# EAGLE board eTapper1main12 (EAGLE 8.2.2)

Size 126.67 x 68.57 mm. Coordinates in mm from the lower left corner, seen from the top.
Outline: 0,0 126.67,0 126.67,68.57 0,68.57 0,0
Copper layers (1*16): Top 0.035mm / dielectric 1.5mm / Bottom 0.035mm
Design rules "default *": minimum track width 6mil, minimum drill 15mil, track to track 6mil, track to pad 6mil, pad to pad 6mil, via to via 6mil, smd to smd 6mil, copper to edge 40mil, drill to drill 6mil, minimum pad ring 10mil, minimum via ring 8mil, stop-mask expansion 4mil, vias tented up to drill 0mil, thermal gap 10mil

## Footprints (pad centres in the part's own frame; a part is rotated, then mirrored left to right if it is on the bottom)
C0805 = smd 1.3 x 1.5: 1 -0.95,0; 2 0.95,0
SOD323_ST = smd 0.8 x 0.6: A 1.25,0; C -1.25,0
SO20W = smd 0.66 x 2.032: 1 -5.715,-5.029; 2 -4.445,-5.029; 3 -3.175,-5.029; 4 -1.905,-5.029; 5 -0.635,-5.029; 6 0.635,-5.029; 7 1.905,-5.029; 8 3.175,-5.029; 9 4.445,-5.029; 10 5.715,-5.029; 11 5.715,5.029; 12 4.445,5.029; 13 3.175,5.029; 14 1.905,5.029; 15 0.635,5.029; 16 -0.635,5.029; 17 -1.905,5.029; 18 -3.175,5.029; 19 -4.445,5.029; 20 -5.715,5.029
TO252 = smd 1 x 1.6: 1 -2.28,-4.8; 3 2.28,-4.8 | smd 5.4 x 6.2: 2 0,2.5
TO92 = drill 0.813 pad 1.27 octagon: 1 -1.27,0; 2 0,1.905; 3 1.27,0
TSSOP38_R-PDSO-G38-DA = smd 0.35 x 1: 1 -5.85,-3.85; 2 -5.2,-3.85; 3 -4.55,-3.85; 4 -3.9,-3.85; 5 -3.25,-3.85; 6 -2.6,-3.85; 7 -1.95,-3.85; 8 -1.3,-3.85; 9 -0.65,-3.85; 10 0,-3.85; 11 0.65,-3.85; 12 1.3,-3.85; 13 1.95,-3.85; 14 2.6,-3.85; 15 3.25,-3.85; 16 3.9,-3.85; 17 4.55,-3.85; 18 5.2,-3.85; 19 5.85,-3.85; 20 5.85,3.85; 21 5.2,3.85; 22 4.55,3.85; 23 3.9,3.85; 24 3.25,3.85; 25 2.6,3.85; 26 1.95,3.85; 27 1.3,3.85; 28 0.65,3.85; 29 0,3.85; 30 -0.65,3.85; 31 -1.3,3.85; 32 -1.95,3.85; 33 -2.6,3.85; 34 -3.25,3.85; 35 -3.9,3.85; 36 -4.55,3.85; 37 -5.2,3.85; 38 -5.85,3.85
SO08 = smd 0.6 x 2.2: 1 -1.905,-2.6; 2 -0.635,-2.6; 3 0.635,-2.6; 4 1.905,-2.6; 5 1.905,2.6; 6 0.635,2.6; 7 -0.635,2.6; 8 -1.905,2.6
DF2 = drill 0.9: 1 -6.35,-3.81; 3 -1.27,-3.81; 5 3.81,-3.81; 6 6.35,-3.81; 7 6.35,3.81; 8 3.81,3.81; 10 -1.27,3.81; 12 -6.35,3.81
L2825P = smd 1.4 x 2.4: 1 -1.2,0; 2 1.2,0
FC-12M = smd 0.7 x 1.4: 1 -0.85,0; 2 0.85,0
R0402 = smd 0.7 x 0.9: 1 -0.65,0; 2 0.65,0
B3F-10XX = drill 1.016 long: 1 -3.251,2.261; 2 3.251,2.261; 3 -3.251,-2.261; 4 3.251,-2.261
M251 = drill 0.813 long: 1 -2.54,0; 2 0,0; 3 2.54,0
F/QMBIII = drill 0.914 pad 2.159 octagon: + 3.251,0; - -3.251,0
TO92' = drill 0.813 octagon: 1 1.27,0; 2 0,1.905; 3 -1.27,0
TP06R = smd 0.6 x 0.6: TP 0,0
I-PAK_TO251AA = drill 0.889 long: 1 -2.286,-5.334; 2 0,-5.334; 3 2.286,-5.334 | smd 5.334 x 6.223: 4 0,4.445
XFMR = drill 0.6 square: P$1 -10.16,5.08; P$2 -10.16,-5.08; P$3 10.16,5.08; P$4 10.16,-5.08
FH12-45S-0.5SH = smd 0.3 x 1.3: 1 -13,3.25; 2 -12.5,3.25; 3 -12,3.25; 4 -11.5,3.25; 5 -11,3.25; 6 -10.5,3.25; 7 -10,3.25; 8 -9.5,3.25; 9 -9,3.25; 10 -8.5,3.25; 11 -8,3.25; 12 -7.5,3.25; 13 -7,3.25; 14 -6.5,3.25; 15 -6,3.25; 16 -5.5,3.25; 17 -5,3.25; 18 -4.5,3.25; 19 -4,3.25; 20 -3.5,3.25; 21 -3,3.25; 22 -2.5,3.25; 23 -2,3.25; 24 -1.5,3.25; 25 -1,3.25; 26 -0.5,3.25; 27 0,3.25; 28 0.5,3.25; 29 1,3.25; 30 1.5,3.25; 31 2,3.25; 32 2.5,3.25; 33 3,3.25; 34 3.5,3.25; 35 4,3.25; 36 4.5,3.25; 37 5,3.25; 38 5.5,3.25; 39 6,3.25; 40 6.5,3.25; 41 7,3.25; 42 7.5,3.25; 43 8,3.25; 44 8.5,3.25; 45 9,3.25
32005-601 = drill 0.7 pad 1.016: 1 2.825,1.6; 2 1.625,0.8; 3 2.825,0; 4 1.625,-0.8; 5 2.825,-1.6 | drill 1 pad 1.422 long: M1 -2.225,3.65; M2 -2.225,-3.65
1501_03 = drill 1.1 pad 1.7: 1 -1.85,0.3; 2 1.85,-1; 3 -1.85,-5.7 | hole 1.1: 0,0; 0,-6

## Placement (x,y rotation side)
C1  .01uF  [C0805]  123.7,45.21 0 top
C2  .01uF  [C0805]  4.57,43.18 270 top
C3  [C0805]  108.46,45.72 270 top
C4  [C0805]  4.83,51.82 90 top
C5  3.3uF  [C0805]  118.11,35.81 90 top
C6  220uF  [C0805]  115.06,35.81 90 top
C7  220uF  [C0805]  17.27,29.46 90 top
C8  3.3uF  [C0805]  20.83,29.46 90 top
C9  47uF  [C0805]  100.58,45.21 270 top
C10  47uF  [C0805]  99.31,30.48 0 top
C11  12pF  [C0805]  60.71,26.16 270 top
C12  12pF  [C0805]  59.69,29.46 0 top
C13  1 uF  [C0805]  45.21,13.21 180 top
C14  .1uF  [C0805]  75.18,22.35 270 top
C15  .1uF  [C0805]  86.11,21.84 270 top
C16  .1uF  [C0805]  114.55,55.63 270 top
C17  .1uF  [C0805]  20.57,60.2 270 top
C18  .1uF  [C0805]  112.01,42.42 180 top
C19  .1uF  [C0805]  20.83,44.2 90 top
C20  .1uF  [C0805]  44.96,24.64 270 top
C21  .1uF  [C0805]  32.26,21.59 180 top
C22  220uF  [C0805]  4.83,47.24 270 top
D1  BAT60J  [SOD323_ST]  11.68,33.53 180 top
D2  BAT60J  [SOD323_ST]  109.73,29.72 0 top
D3  BAT60J  [SOD323_ST]  2.54,47.24 90 top
IC1  74AC373DW  [SO20W]  87.38,32.26 90 top
IC2  74AC373DW  [SO20W]  29.21,30.73 90 top
IC3  LM2936DT-5.0  [TO252]  10.67,61.72 90 top
IC4  LM2936Z-3.0  [TO92]  104.39,44.96 270 top
IC5  MSP430F2232IDA  [TSSOP38_R-PDSO-G38-DA]  52.32,30.99 90 top
IC7  LP2951M  [SO08]  122.43,37.34 0 top
IC8  LP2951M  [SO08]  3.56,37.08 0 top
K2  DF2-DC3V  [DF2]  96.52,8.38 270 top
K3  DF2-DC3V  [DF2]  30.48,8.38 270 top
L3  470uH  [L2825P]  100.58,60.96 90 top
Q3  FC-12M  [FC-12M]  58.42,26.92 90 top
R1  47K  [R0402]  123.95,49.28 180 top
R2  47K  [R0402]  123.95,54.1 180 top
R3  47K  [R0402]  123.95,58.93 180 top
R4  [R0402]  123.7,63.75 180 top
R5  47K  [R0402]  120.9,43.18 270 top
R6  47K  [R0402]  45.21,10.92 180 top
R7  1K  [R0402]  123.95,47.5 0 top
R8  3K  [R0402]  123.95,52.32 0 top
R9  6K  [R0402]  123.95,56.9 0 top
R10  12K  [R0402]  123.7,61.98 0 top
R11  3K  [R0402]  123.44,43.18 0 top
R12  51K  [R0402]  102.62,8.64 90 top
R13  1K  [R0402]  106.17,29.72 0 top
R14  1K  [R0402]  95.25,56.64 90 top
R15  47K  [R0402]  13.21,56.9 180 top
R16  47K  [R0402]  13.21,52.07 180 top
R17  47K  [R0402]  13.46,47.5 180 top
R18  47K  [R0402]  18.29,43.43 180 top
R19  47K  [R0402]  13.97,36.32 270 top
R20  47K  [R0402]  4.83,56.64 90 top
R21  1K  [R0402]  56.64,23.11 180 top
R22  1K  [R0402]  13.21,55.12 0 top
R23  3K  [R0402]  13.21,50.29 0 top
R24  6K  [R0402]  13.46,45.97 0 top
R25  12K  [R0402]  14.48,43.43 0 top
R26  3K  [R0402]  2.79,43.18 90 top
R27  51K  [R0402]  24.38,8.38 270 top
R28  47K  [R0402]  76.96,22.1 90 top
R29  47K  [R0402]  88.65,21.59 90 top
R30  47K  [R0402]  112.78,55.88 270 top
R31  47K  [R0402]  18.54,60.2 270 top
R32  47K  [R0402]  112.01,44.2 180 top
R33  47K  [R0402]  22.61,44.45 270 top
R34  47K  [R0402]  42.67,24.89 270 top
R35  100  [R0402]  27.43,18.03 180 top
R36  47K  [R0402]  24.13,22.1 90 top
S1  [B3F-10XX]  71.12,19.05 90 bottom
S2  [B3F-10XX]  81.28,19.05 90 bottom
S3  [B3F-10XX]  108.58,52.7 90 bottom
S4  [B3F-10XX]  18.41,52.7 90 bottom
S5  [B3F-10XX]  108.58,35.94 90 bottom
S6  [B3F-10XX]  18.41,37.47 90 bottom
S7  [B3F-10XX]  50.29,19.05 90 bottom
S8  [M251]  38.1,19.05 90 bottom
SG1  F/QMBIII  [F/QMBIII]  108.71,62.23 0 top
T1  2N3904  [TO92']  97.03,60.96 90 top
T2  2N3904  [TO92']  8.64,55.12 0 top
T3  2N3904  [TO92']  118.62,47.5 0 top
T4  2N3904  [TO92']  118.62,52.32 0 top
T5  2N3904  [TO92']  118.62,57.15 0 top
T6  2N3904  [TO92']  118.62,61.98 0 top
T7  2N3904  [TO92']  117.35,42.67 270 top
T9  2N3904  [TO92']  8.64,50.55 0 top
T10  2N3904  [TO92']  8.89,45.97 0 top
T11  2N3904  [TO92']  10.41,41.4 0 top
T12  2N3904  [TO92']  10.41,37.59 180 top
TP1  TPSTP06R  [TP06R]  2.54,61.47 0 top
TP2  TPSTP06R  [TP06R]  2.54,60.2 0 top
TP3  TPSTP06R  [TP06R]  2.54,58.93 0 top
TP4  TPSTP06R  [TP06R]  2.54,57.66 0 top
TP5  TPSTP06R  [TP06R]  2.54,56.39 0 top
TP6  TPSTP06R  [TP06R]  2.54,55.12 0 top
TP7  TPSTP06R  [TP06R]  2.54,62.74 0 top
TP8  TPSTP06R  [TP06R]  2.54,49.78 0 top
TP9  TPSTP06R  [TP06R]  2.54,52.83 0 top
U$1  IRLR024N  [I-PAK_TO251AA]  119.13,29.72 270 top
U$2  IRLR024N  [I-PAK_TO251AA]  8.13,29.72 90 top
U$3  XFMR  [XFMR]  114.3,12.95 180 top
U$4  XFMR  [XFMR]  12.19,12.95 0 top
X1  FH12-45S-0.5SH  [FH12-45S-0.5SH]  30.23,55.12 90 top
X2  MINI-USB_SHIELD5P2-32005-601  [32005-601]  46.99,6.1 90 top
X3  MINI-USB_SHIELD5P2-32005-601  [32005-601]  80.01,6.1 90 top
X4  1501_03  [1501_03]  88.27,2.41 180 top
X5  1501_03  [1501_03]  38.73,2.41 180 top

## Library data of the parts
C1-C22 L3 = rcl
D1-D3 = diode
IC1 IC2 = 74xx-eu
IC3 = national-semiconductor; MF: NATIONAL SEMICONDUCTOR; MPN: LM2936DT-5.0/NOPB; OC_FARNELL: 1286864; OC_NEWARK: 41K4501
IC4 = national-semiconductor; MF: NATIONAL SEMICONDUCTOR; MPN: LM2936Z-3.0/NOPB; OC_FARNELL: 1312709; OC_NEWARK: 41K4531
IC5 = texas; MPN: MSP430F2232IDA; OC_FARNELL: 1610178; OC_NEWARK: 28M6312
IC7 IC8 = national-semiconductor; MF: FAIRCHILD SEMICONDUCTOR; MPN: LP2951CM; OC_FARNELL: 9488561; OC_NEWARK: 78K6014
K2 K3 = relay; OC_FARNELL: unknown; OC_NEWARK: unknown
Q3 = crystal
R1-R36 = resistor
S1-S7 = switch-omron; MPN: B3F-1000; OC_FARNELL: 176432; OC_NEWARK: 36M3542
S8 = switch
SG1 = buzzer; OC_FARNELL: unknown; OC_NEWARK: unknown
T1-T7 T9-T12 = transistor-neu-to92
TP1-TP9 = testpad
U$1 U$2 = IRLR024N
U$3 U$4 = XFMR
X1 = con-hirose; OC_FARNELL: unknown; OC_NEWARK: unknown
X2 X3 = con-cypressindustries; OC_FARNELL: unknown; OC_NEWARK: unknown
X4 X5 = con-lumberg; OC_FARNELL: 1200127; OC_NEWARK: unknown

## Nets
+3V: C9.1 IC1.20 IC2.20 IC4.1 IC5.2 IC5.16 R20.2 R28.2 R29.2 R30.2 R31.2 R32.2 R33.2 R34.2 R36.2 TP5.TP X1.2 X1.3 X3.4
+9V: C3.1 C4.1 D3.C IC3.1 IC4.3 IC5.28 IC7.8 IC8.8
/LCS: IC5.8 X1.8
/RST: C13.1 IC5.7 R6.1
BAT+: C22.1 D3.A TP8.TP
GND: C3.2 C4.2 C5.2 C6.2 C7.2 C8.2 C9.2 C10.2 C11.2 C12.2 C13.2 C14.2 C15.2 C16.2 C17.2 C18.2 C19.2 C20.2 C21.2 C22.2 IC1.1 IC1.10 IC2.1 IC2.10 IC3.2 IC4.2 IC5.4 IC5.15 S1.4 S2.4 S3.4 S4.4 S5.4 S6.4 S7.4 S8.2 T1.3 T2.3 T3.3 T4.3 T5.3 T6.3 T7.3 T9.3 T10.3 T11.3 T12.3 TP7.TP TP9.TP U$1.3 U$2.3 X1.1 X1.4 X1.5 X1.6 X1.12 X1.13 X1.14 X1.15 X1.16 X1.25 X1.26 X1.27 X1.28 X1.29 X1.30 X1.31 X1.32 X1.33 X1.34 X1.45 X2.4 X2.5 X3.5
IO1_0: C14.1 IC5.31 R28.1 S1.2
IO1_1: C15.1 IC5.32 R29.1 S2.2
IO1_2: C16.1 IC5.33 R30.1 S3.2
IO1_3: C17.1 IC5.34 R31.1 S4.2
IO4_0: IC1.3 IC2.3 IC5.17 X1.17
IO4_1: IC1.4 IC2.4 IC5.18 X1.18
IO4_2: IC1.7 IC2.7 IC5.19 X1.19
IO4_3: IC1.8 IC2.8 IC5.20 X1.20
IO4_4: IC1.13 IC2.13 IC5.21 X1.21
IO4_5: IC5.22 X1.22
IO4_6: IC5.23 X1.23
IO4_7: IC5.24 X1.24
J2_1: K2.3 R12.1 U$3.P$3
J2_3: K2.10 R12.2 U$3.P$4
J3_1: K3.3 R27.1 U$4.P$3
J3_3: K3.10 R27.2 U$4.P$4
LD_/C: IC5.29 X1.9
LEDA: X1.36
LEDK1: X1.37
LEDK2: X1.38
LEDK3: X1.39
LEDK4: X1.40
LHVTRIG: IC5.30 R13.1
LNC1: X1.41
LNC2: X1.42
LNC3: X1.43
LNC4: X1.44
LRD: IC5.10 X1.11
LRESET: IC5.26 X1.7
LSDO: X1.35
LTS+: K2.8 X4.1
LTS-: K2.5 X4.3
LVSEL: IC1.11 IC5.14
LWR: IC5.9 X1.10
N$1: IC1.2 R1.1
N$2: IC1.5 R2.1
N$3: IC1.6 R3.1
N$4: IC1.9 R4.1
N$5: IC1.12 R5.1
N$6: L3.2 SG1.- T1.1
N$7: R4.2 T6.2
N$8: R5.2 T7.2
N$9: D2.A U$1.2 U$1.4 U$3.P$1
N$10: R7.1 T3.1
N$11: R8.1 T4.1
N$12: R9.1 T5.1
N$13: R1.2 T3.2
N$14: R2.2 T4.2
N$15: R3.2 T5.2
N$16: R10.1 T6.1
N$17: C1.2 IC7.7 R7.2 R8.2 R9.2 R10.2 R11.2
N$18: C1.1 C5.1 C6.1 D2.C IC7.1 R11.1 U$3.P$2
N$19: D1.A U$2.2 U$2.4 U$4.P$1
N$20: IC2.2 R15.1
N$21: R13.2 U$1.1
N$22: R14.2 T1.2
N$23: R35.1 S8.1
N$24: IC2.5 R16.1
N$25: IC2.6 R17.1
N$26: IC2.9 R18.1
N$27: IC2.12 R19.1
N$29: R15.2 T2.2
N$30: R16.2 T9.2
N$31: R17.2 T10.2
N$32: R18.2 T11.2
N$33: R19.2 T12.2
N$34: K2.1 K3.1 R35.2
N$35: R22.1 T2.1
N$36: R23.1 T9.1
N$37: R24.1 T10.1
N$38: R25.1 T11.1
N$39: C2.2 IC8.7 R22.2 R23.2 R24.2 R25.2 R26.2
N$40: C2.1 C7.1 C8.1 D1.C IC8.1 R26.1 U$4.P$2
N$42: R21.2 U$2.1
N$45: IC7.4 T7.1
N$47: IC8.4 T12.1
RHVTRIG: IC5.3 R21.1
RTS+: K3.8 X5.1
RTS-: K3.5 X5.3
RVSEL: IC2.11 IC5.25
SCL: IC5.13 X2.2 X3.2
SDA: IC5.12 X2.3 X3.3
SPKR: IC5.11 R14.1
TCK: C18.1 IC5.35 R32.1 S5.2 TP4.TP
TDI: C20.1 IC5.37 R34.1 S7.2 TP2.TP
TDO: C21.1 IC5.38 R36.1 S8.3 TP1.TP
TEST: IC5.1 R20.1 TP6.TP
TMS: C19.1 IC5.36 R33.1 S6.2 TP3.TP
VCC: C10.1 IC3.3 K2.7 K2.12 K3.7 K3.12 L3.1 R6.2 SG1.+ X2.1 X3.1
XIN: C12.1 IC5.6 Q3.2
XOUT: C11.1 IC5.5 Q3.1

## Tracks (layer width: path | path; a pad name or v marks a point on that pad's centre or on a via)
+3V  (18 unrouted)
+9V  (7 unrouted)
/LCS  (1 unrouted)
/RST  (2 unrouted)
BAT+  (2 unrouted)
GND  (73 unrouted)
IO1_0  (3 unrouted)
IO1_1  (3 unrouted)
IO1_2  (3 unrouted)
IO1_3  (3 unrouted)
IO4_0  (3 unrouted)
IO4_1  (3 unrouted)
IO4_2  (3 unrouted)
IO4_3  (3 unrouted)
IO4_4  (3 unrouted)
IO4_5  (1 unrouted)
IO4_6  (1 unrouted)
IO4_7  (1 unrouted)
J2_1  (2 unrouted)
J2_3  (2 unrouted)
J3_1  (2 unrouted)
J3_3  (2 unrouted)
LD_/C  (1 unrouted)
LHVTRIG  (1 unrouted)
LRD  (1 unrouted)
LRESET  (1 unrouted)
LTS+  (1 unrouted)
LTS-  (1 unrouted)
LVSEL  (1 unrouted)
LWR  (1 unrouted)
N$1  (1 unrouted)
N$2  (1 unrouted)
N$3  (1 unrouted)
N$4  (1 unrouted)
N$5  (1 unrouted)
N$6  (2 unrouted)
N$7  (1 unrouted)
N$8  (1 unrouted)
N$9  (3 unrouted)
N$10  (1 unrouted)
N$11  (1 unrouted)
N$12  (1 unrouted)
N$13  (1 unrouted)
N$14  (1 unrouted)
N$15  (1 unrouted)
N$16  (1 unrouted)
N$17  (6 unrouted)
N$18  (6 unrouted)
N$19  (3 unrouted)
N$20  (1 unrouted)
N$21  (1 unrouted)
N$22  (1 unrouted)
N$23  (1 unrouted)
N$24  (1 unrouted)
N$25  (1 unrouted)
N$26  (1 unrouted)
N$27  (1 unrouted)
N$29  (1 unrouted)
N$30  (1 unrouted)
N$31  (1 unrouted)
N$32  (1 unrouted)
N$33  (1 unrouted)
N$34  (2 unrouted)
N$35  (1 unrouted)
N$36  (1 unrouted)
N$37  (1 unrouted)
N$38  (1 unrouted)
N$39  (6 unrouted)
N$40  (6 unrouted)
N$42  (1 unrouted)
N$45  (1 unrouted)
N$47  (1 unrouted)
RHVTRIG  (1 unrouted)
RTS+  (1 unrouted)
RTS-  (1 unrouted)
RVSEL  (1 unrouted)
SCL  (2 unrouted)
SDA  (2 unrouted)
SPKR  (1 unrouted)
TCK  (4 unrouted)
TDI  (4 unrouted)
TDO  (4 unrouted)
TEST  (2 unrouted)
TMS  (4 unrouted)
VCC  (10 unrouted)
XIN  (2 unrouted)
XOUT  (2 unrouted)
(copper drawn outside any net)
  shapes: Bottom area x1, Top area x1